# Altium PCB AgulhasCPU25.PCBDOC (part 8 of 10)
Units mm, origin at the board's own origin, x right, y up, seen from the top; angles counter-clockwise.
Board outline 179.96 x 114.94 mm, 2 copper layers (Top Layer, Top, Bottom Layer, Bottom), stack 1.341 mm thick; 247 components, 222 nets, 910 pads, 491 vias.
Unrouted connection lines stored in the file: 2.
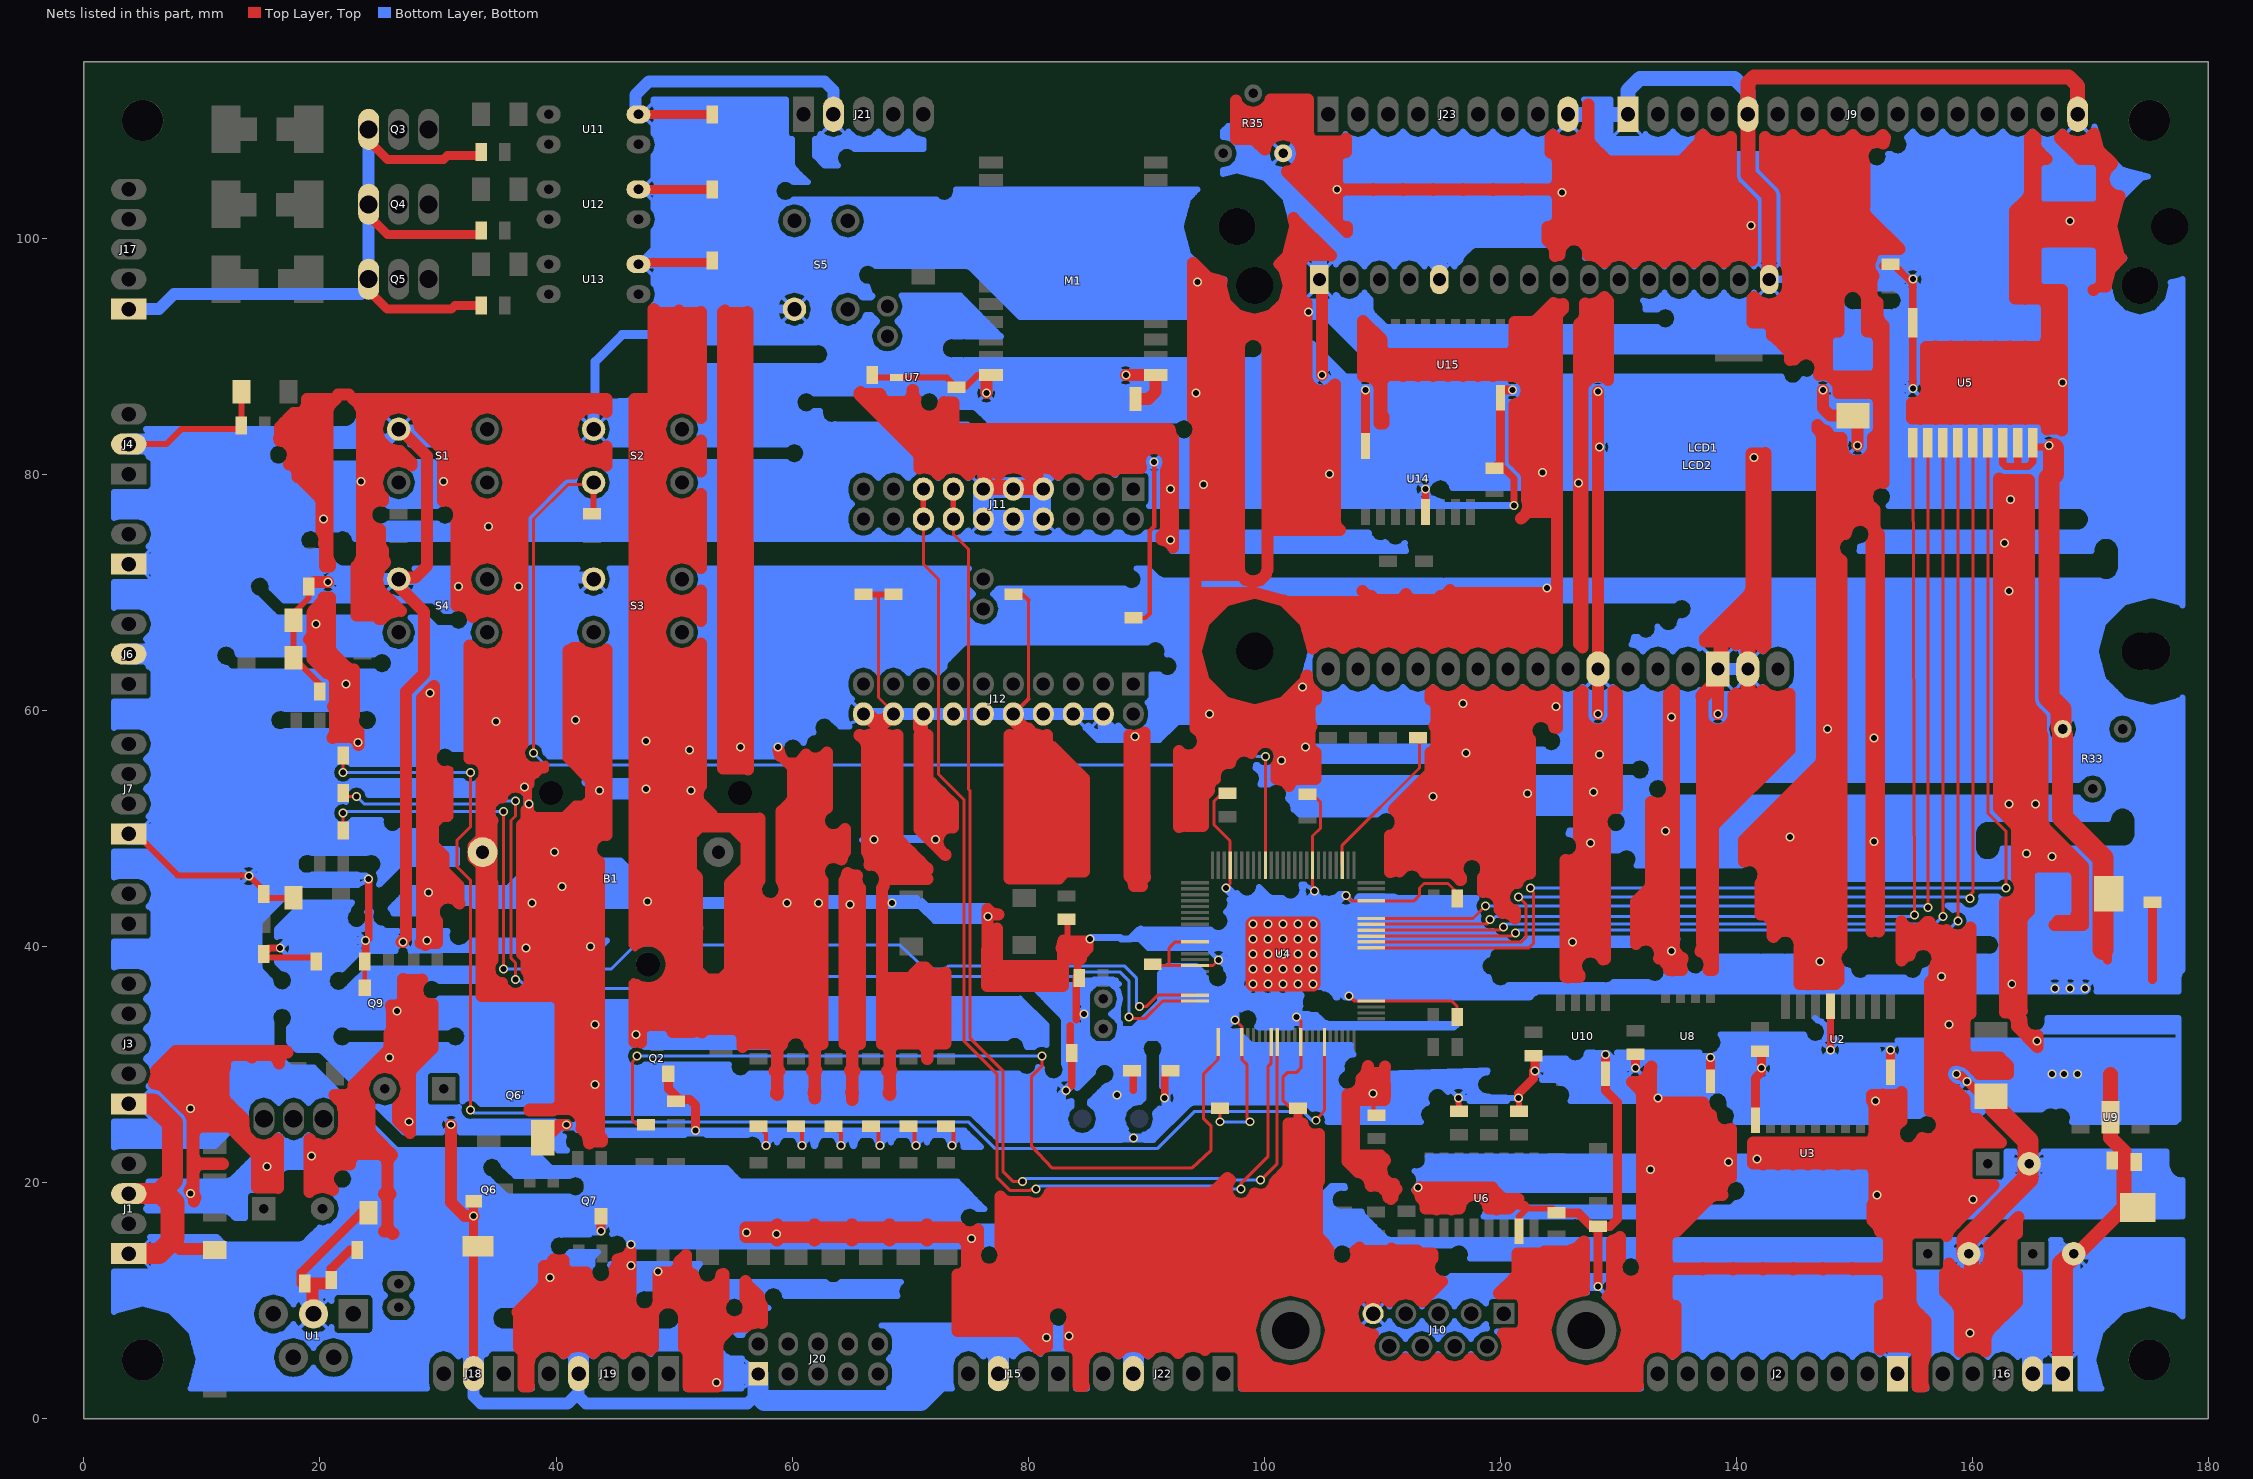
[diagram p8: the nets of this part, all layers, seen from the top]

## Via types
v1: diameter 0.762, hole 0.508, Top Layer, Top to Bottom Layer, Bottom, 489 vias
v2: diameter 0.864, hole 0.813, Top Layer, Top to Bottom Layer, Bottom, 2 vias

## Nets (pads, with @x,y where several pads share a name; then routed paths per layer and width w, separated by ;. In a path a pad name is that pad's centre, name@x,y a point inside that pad or via, vN(x,y) a via of type N, cw(c..) or ccw(c..) an arc to the next point about the centre after c; other vN are vias at no path point) (continued)
GND: (continued)
  Bottom Layer, Bottom w0.508: 89.789,71.12 89.637,71.628 89.281,71.984 89.179,72.034 90.145,72.034 90.627,71.552 90.983,71.196 91.44,71.018 115.037,71.018 115.189,70.968 115.316,71.018 170.764,71.018 171.069,70.891 171.552,70.891 172.009,71.069 172.364,71.425 172.568,71.882 172.568,72.492 172.568,73.762 172.364,74.219 172.009,74.574 171.552,74.778 171.069,74.778 170.612,74.574 170.256,74.219 170.078,73.762 170.078,73.508 150.419,73.508 150.495,73.787 ; 90.83,25.4 90.653,24.663 90.119,24.13 89.814,24.054 89.916,23.749 89.865,23.597 90.602,23.597 93.472,26.441 93.675,26.645 93.955,26.772 103.378,26.772 103.657,26.645 104.089,26.213 104.394,26.289 104.902,26.137 105.258,25.781 105.41,25.273 105.359,25.121 113.284,25.121 113.157,25.248 113.005,25.781 ; 90.83,25.4 90.729,25.857 90.983,26.111 91.135,26.264 91.567,26.137 92.075,26.289 92.431,26.645 92.583,27.178 92.431,27.686 92.075,28.042 91.567,28.194 91.338,28.118 91.338,30.734 ; 91.694,81.026 91.542,80.493 91.186,80.137 90.678,79.985 90.322,80.086 90.373,80.035 90.449,79.807 90.449,77.648 90.373,77.419 90.246,77.318 119.355,77.318 119.507,77.343 119.634,77.318 120.117,77.318 120.117,77.343 120.117,77.368 115.418,77.368 115.138,77.47 114.935,77.673 114.91,77.699 114.402,77.851 114.3,77.953 114.173,77.851 113.665,77.699 113.132,77.851 112.776,78.207 112.624,78.74 ; 91.821,65.024 91.745,64.745 91.821,64.77 92.329,64.618 92.685,64.262 92.837,63.754 92.685,63.221 92.329,62.865 91.821,62.713 91.288,62.865 91.135,63.017 90.449,63.017 90.449,61.138 90.373,60.909 90.145,60.681 90.119,60.681 90.221,60.554 90.399,59.969 90.399,59.385 90.221,58.801 89.662,58.242 88.9,58.014 88.113,58.242 87.63,58.725 87.122,58.242 86.36,58.014 85.573,58.242 85.09,58.725 84.861,58.522 85.903,57.506 91.11,57.506 92.329,58.699 92.532,58.903 92.812,59.03 122.758,59.03 122.911,59.157 123.444,59.309 123.952,59.157 124.308,58.801 124.435,58.395 124.841,58.268 125.197,57.912 125.349,57.404 ; 92.685,82.931 93.218,82.779 93.726,82.931 ; 96.495,33.782 96.647,34.29 97.003,34.646 97.536,34.798 98.019,34.671 98.069,34.696 98.603,34.849 99.111,34.696 99.466,34.341 99.619,33.833 99.466,33.299 99.39,33.198 99.492,33.122 102.311,33.122 102.21,33.147 101.854,33.503 101.702,34.036 101.854,34.544 102.21,34.9 102.743,35.052 103.048,34.95 103.022,35.077 103.022,35.509 103.149,35.865 102.87,35.789 102.337,35.941 102.235,36.043 102.108,35.941 101.6,35.789 101.067,35.941 100.965,36.043 100.838,35.941 100.33,35.789 99.797,35.941 99.695,36.043 99.568,35.941 99.06,35.789 98.527,35.941 98.171,36.297 98.019,36.83 ; 96.495,33.782 96.647,33.249 97.003,32.893 97.536,32.741 97.866,32.842 97.866,32.817 97.968,32.537 98.171,32.334 98.552,31.953 98.755,31.75 99.035,31.648 107.34,31.648 107.29,31.496 ; 96.774,42.926 97.003,42.672 97.155,42.164 ; 96.774,42.926 97.003,43.155 97.155,43.688 ; 97.155,43.688 97.053,43.993 97.282,44.069 ; 97.257,10.16 97.257,5.918 97.485,5.918 97.714,5.842 97.942,5.613 98.019,5.385 98.019,2.54 ; 97.282,44.069 97.638,44.425 97.688,44.526 98.019,44.196 98.552,44.044 99.06,44.196 99.416,44.552 99.568,45.034 100.203,44.399 100.406,44.196 100.686,44.094 101.549,44.094 101.702,43.942 102.235,43.79 102.743,43.942 103.099,44.298 103.251,44.831 ; 98.019,2.54 131.928,2.54 ; 98.019,2.54 131.928,2.54 ; 98.019,36.83 98.171,37.338 98.273,37.465 98.171,37.567 98.019,38.1 98.171,38.608 98.273,38.735 ; 98.019,40.64 98.171,41.148 98.273,41.275 98.171,41.377 98.019,41.91 98.171,42.418 98.527,42.774 99.06,42.926 99.568,42.774 99.695,42.672 99.797,42.774 100.33,42.926 100.838,42.774 100.965,42.672 101.067,42.774 101.6,42.926 102.108,42.774 102.235,42.672 102.337,42.774 102.87,42.926 103.378,42.774 103.505,42.672 103.607,42.774 104.14,42.926 104.648,42.774 105.004,42.418 105.156,41.91 105.004,41.377 104.902,41.275 105.004,41.148 105.156,40.64 ; 98.019,40.64 98.171,40.107 98.273,40.005 98.171,39.878 98.019,39.37 98.171,38.837 98.273,38.735 ; 99.568,89.789 99.619,89.814 99.898,90.094 99.924,90.145 100,90.348 100.051,90.475 100.051,90.526 100.076,90.678 100.051,90.805 100.051,90.856 100,90.983 99.974,91.084 104.064,91.084 106.553,88.595 106.756,88.392 107.036,88.29 143.815,88.29 143.891,87.986 144.247,87.63 144.78,87.478 145.288,87.63 145.644,87.986 145.669,88.062 145.923,87.986 146.431,88.138 146.787,88.494 146.939,89.027 ; 102.489,51.689 102.464,51.587 102.616,51.537 102.972,51.181 102.997,51.156 109.55,51.156 109.83,51.41 110.363,51.562 110.871,51.41 111.023,51.283 129.108,51.283 129.261,51.41 129.794,51.562 130.302,51.41 130.658,51.054 130.81,50.546 ; 102.489,51.689 102.337,52.197 102.006,52.553 102.108,52.959 101.956,53.467 101.6,53.823 101.092,53.975 100.559,53.823 100.406,53.696 99.67,53.696 99.822,54.229 99.67,54.737 99.314,55.093 99.238,55.118 99.314,55.372 99.416,55.372 99.568,55.22 100.101,55.067 100.609,55.22 100.965,55.575 101.117,56.109 101.092,56.159 101.905,56.159 103.505,54.559 103.708,54.356 103.988,54.254 131.14,54.254 131.293,54.102 131.826,53.95 132.334,54.102 132.69,54.458 132.842,54.991 132.69,55.499 132.334,55.855 131.826,56.007 131.293,55.855 131.14,55.728 104.445,55.728 103.251,56.921 122.225,56.921 122.377,56.769 122.657,56.667 123.647,56.667 123.8,56.515 124.333,56.363 124.841,56.515 125.197,56.871 125.349,57.404 ; 103.149,33.122 116.053,33.122 ; 103.149,33.122 116.053,33.122 ; 103.149,33.122 103.251,33.147 103.607,33.503 ; 103.251,44.831 103.149,45.237 103.403,45.237 103.378,45.187 103.226,44.679 103.378,44.145 103.734,43.79 104.267,43.637 104.775,43.79 105.105,44.12 105.486,44.018 105.943,44.145 106.045,43.79 106.401,43.434 106.934,43.282 107.442,43.434 107.798,43.79 107.925,44.196 107.975,44.221 110.973,44.221 111.125,44.171 111.354,44.094 117.983,44.094 117.856,43.942 117.704,43.434 117.856,42.901 118.161,42.596 118.085,42.291 118.237,41.758 118.593,41.402 ; 103.607,33.503 103.759,34.036 103.683,34.265 ; 103.683,34.265 103.911,34.188 104.419,34.188 104.699,33.909 105.029,33.579 105.308,33.452 105.435,33.426 116.408,33.426 116.053,33.122 ; 104.369,87.503 104.013,87.859 103.861,88.392 104.013,88.9 104.369,89.256 104.902,89.408 105.41,89.256 105.766,88.9 105.918,88.392 105.766,87.859 105.41,87.503 ; 104.369,87.503 104.902,87.351 105.41,87.503 ; 104.673,66.929 104.673,66.954 104.673,66.98 104.724,67.081 104.775,67.208 104.8,67.234 104.8,67.259 104.902,67.335 104.978,67.412 105.004,67.412 106.934,69.113 107.01,69.19 107.036,69.19 107.061,69.215 107.163,69.266 107.29,69.317 107.315,69.317 107.34,69.317 107.442,69.317 134.696,69.317 134.849,69.444 135.382,69.596 135.89,69.444 136.246,69.088 136.398,68.58 136.246,68.047 135.89,67.691 ; 104.673,66.929 104.673,66.802 104.648,66.7 104.673,66.675 104.673,65.456 104.572,65.43 103.962,64.821 103.81,64.211 103.81,62.763 103.962,62.154 104.572,61.544 105.41,61.316 106.223,61.544 106.68,61.976 ; 104.902,38.735 105.004,38.608 105.156,38.1 105.004,37.567 104.902,37.465 105.004,37.338 105.156,36.83 ; 104.902,38.735 105.004,38.837 105.156,39.37 105.004,39.878 104.902,40.005 105.004,40.107 105.156,40.64 ; 105.156,36.83 105.054,36.424 105.232,36.424 105.639,36.246 105.969,35.916 106.045,35.712 106.121,35.662 106.197,35.662 106.147,35.814 106.299,36.322 106.655,36.678 107.188,36.83 107.696,36.678 108.052,36.322 108.204,35.814 108.153,35.662 122.453,35.662 122.479,35.662 122.809,35.992 123.088,36.119 123.215,36.17 166.04,36.17 165.964,36.449 ; 105.512,18.542 105.562,18.669 105.562,18.72 105.588,18.847 105.664,19.05 105.689,19.101 105.969,19.38 106.02,19.406 106.223,19.482 106.35,19.533 106.401,19.533 106.553,19.558 106.68,19.533 106.832,19.533 106.782,19.685 ; 105.512,18.542 105.562,18.39 105.562,18.339 105.588,18.212 105.664,18.009 105.689,17.958 105.969,17.678 106.02,17.653 106.223,17.577 106.35,17.551 106.401,17.551 106.553,17.501 106.68,17.551 108.229,17.551 108.28,17.424 108.356,17.196 108.636,16.916 110.007,15.545 110.287,15.265 110.668,15.138 126.213,15.138 126.365,15.088 126.492,15.138 154.635,15.138 154.61,15.037 154.61,12.878 154.661,12.649 154.889,12.421 155.118,12.37 157.277,12.37 157.505,12.421 157.734,12.649 157.81,12.878 157.81,15.037 157.759,15.138 158.572,15.138 158.242,14.783 158.013,13.97 ; 106.68,61.976 107.112,61.544 107.95,61.316 108.763,61.544 109.22,61.976 ; 107.29,31.496 107.442,30.963 107.544,30.861 107.036,30.709 106.68,30.353 106.528,29.845 106.604,29.591 106.528,29.566 106.172,29.21 106.02,28.702 106.172,28.169 106.528,27.813 107.061,27.661 107.569,27.813 107.721,27.965 108.585,27.965 108.864,28.067 110.033,29.235 118.237,29.489 118.923,29.489 118.872,29.337 118.339,29.185 117.983,28.829 117.831,28.321 117.983,27.788 118.339,27.432 118.872,27.28 118.948,27.305 118.999,27.28 119.05,27.254 119.126,27.229 119.228,27.203 119.278,27.203 119.329,27.178 119.431,27.203 120.498,27.203 120.498,27.178 120.574,26.899 117.399,26.899 117.475,27.178 117.323,27.686 116.967,28.042 116.459,28.194 115.926,28.042 115.57,27.686 115.545,27.686 115.189,28.042 114.681,28.194 114.148,28.042 113.792,27.686 113.64,27.178 113.767,26.721 113.513,26.645 113.157,26.289 113.005,25.781 ; 107.544,87.122 107.696,87.63 108.052,87.986 108.585,88.138 109.093,87.986 109.449,87.63 109.601,87.122 ; 107.544,87.122 107.696,86.589 108.052,86.233 108.585,86.081 109.093,86.233 109.449,86.589 109.601,87.122 ; 109.22,61.976 109.652,61.544 110.49,61.316 111.303,61.544 111.76,61.976 ; 109.601,87.122 119.99,87.122 ; 111.76,61.976 112.192,61.544 113.03,61.316 113.843,61.544 114.3,61.976 ; 112.624,78.74 112.776,79.248 113.132,79.604 113.665,79.756 114.173,79.604 114.3,79.502 114.402,79.604 114.935,79.756 115.443,79.604 115.799,79.248 115.926,78.842 151.587,78.842 151.74,78.969 152.273,79.121 152.781,78.969 153.137,78.613 153.289,78.105 153.137,77.572 152.883,77.318 169.113,77.318 169.52,77.14 169.85,76.81 170.028,76.403 170.028,75.971 169.85,75.565 169.52,75.235 169.113,75.082 151.46,75.082 151.511,74.93 ; 114.148,12.827 114.249,13.183 107.264,13.183 107.112,13.03 106.604,12.878 106.07,13.03 105.715,13.386 105.562,13.919 105.715,14.427 106.07,14.783 106.604,14.935 107.112,14.783 107.264,14.656 115.824,14.656 115.976,14.783 116.51,14.935 117.018,14.783 117.373,14.427 117.526,13.919 117.424,13.564 130.378,13.564 130.531,13.691 131.064,13.843 131.572,13.691 131.928,13.335 132.08,12.827 ; 114.148,12.827 114.3,12.294 114.656,11.938 115.189,11.786 115.697,11.938 115.849,12.09 127.838,12.09 127.737,12.04 127.381,11.684 127.229,11.176 127.356,10.693 127.279,10.719 125.628,10.287 124.435,9.093 124.003,7.468 124.435,5.817 125.628,4.623 127.279,4.191 128.905,4.623 130.099,5.817 130.531,7.468 130.099,9.093 128.905,10.287 128.803,10.312 129.134,10.643 129.286,11.176 129.134,11.684 128.778,12.04 128.676,12.09 130.378,12.09 130.531,11.938 131.064,11.786 131.572,11.938 131.928,12.294 132.08,12.827 ; 114.3,61.976 114.732,61.544 115.57,61.316 116.383,61.544 116.84,61.976 ; 116.611,98.171 116.713,98.45 116.916,98.654 117.348,99.085 117.551,99.289 117.831,99.416 125.552,99.416 125.705,99.543 126.238,99.695 126.746,99.543 127.102,99.187 127.254,98.679 127.152,98.298 127.533,98.374 128.245,98.196 128.778,97.663 128.803,97.587 128.803,97.663 129.337,98.196 130.073,98.374 130.785,98.196 131.318,97.663 131.343,97.587 131.343,97.663 131.877,98.196 132.613,98.374 133.325,98.196 133.858,97.663 133.883,97.587 133.883,97.663 134.417,98.196 135.153,98.374 135.865,98.196 136.398,97.663 136.423,97.587 136.423,97.663 136.957,98.196 137.693,98.374 138.405,98.196 138.938,97.663 138.963,97.587 138.963,97.663 139.497,98.196 140.233,98.374 140.945,98.196 141.478,97.663 141.503,97.587 141.503,97.663 142.037,98.196 142.773,98.374 143.485,98.196 144.018,97.663 144.17,97.13 144.17,95.834 144.018,95.301 143.485,94.767 142.773,94.59 142.037,94.767 141.503,95.301 141.503,95.377 141.478,95.301 140.945,94.767 140.233,94.59 139.497,94.767 138.963,95.301 138.963,95.377 138.938,95.301 138.405,94.767 137.693,94.59 136.957,94.767 136.423,95.301 136.423,95.377 136.398,95.301 135.865,94.767 135.153,94.59 134.417,94.767 133.883,95.301 133.883,95.377 133.858,95.301 133.325,94.767 132.613,94.59 132.08,94.717 132.182,94.615 132.334,94.107 132.283,93.955 133.299,93.955 133.452,94.082 133.985,94.234 134.493,94.082 134.849,93.726 135.001,93.218 ; 116.611,98.171 116.611,98.146 116.103,97.663 116.103,97.587 116.078,97.663 115.545,98.196 114.833,98.374 114.097,98.196 113.563,97.663 113.563,97.587 113.538,97.663 113.005,98.196 112.293,98.374 111.557,98.196 111.023,97.663 111.023,97.587 110.998,97.663 110.465,98.196 109.753,98.374 109.017,98.196 108.483,97.663 108.483,97.587 108.458,97.663 107.925,98.196 107.213,98.374 106.477,98.196 106.07,97.765 106.07,97.815 105.994,98.044 105.766,98.273 105.537,98.349 103.784,98.349 103.556,98.273 103.327,98.044 103.276,97.815 103.276,95.148 103.327,94.92 103.556,94.691 103.784,94.64 105.537,94.64 105.766,94.691 105.994,94.92 106.07,95.148 106.07,95.199 106.477,94.767 107.213,94.59 107.925,94.767 108.458,95.301 108.483,95.377 108.483,95.301 109.017,94.793 109.017,94.209 109.017,93.929 109.118,93.65 109.322,93.447 109.982,92.786 110.185,92.583 110.465,92.481 133.299,92.481 133.452,92.329 133.985,92.177 134.493,92.329 134.849,92.685 135.001,93.218 ; 116.84,61.976 117.272,61.544 118.11,61.316 118.923,61.544 119.38,61.976 ; 118.212,38.354 118.364,37.821 118.72,37.465 118.999,37.389 119.126,36.932 119.482,36.576 120.015,36.424 120.523,36.576 120.675,36.728 128.753,36.728 128.905,36.678 129.413,36.83 ; 118.212,38.354 118.364,38.862 118.72,39.218 118.897,39.268 118.999,39.624 119.355,39.98 119.888,40.132 120.218,40.03 120.371,40.107 131.648,40.107 131.801,40.234 132.334,40.386 132.842,40.234 133.198,39.878 133.35,39.37 133.35,39.345 135.255,39.345 135.026,39.548 135.001,39.599 134.925,39.802 134.899,39.929 134.899,39.98 134.849,40.132 134.899,40.259 134.899,40.31 134.925,40.437 135.001,40.64 135.001,40.665 122.174,40.665 122.149,40.615 121.793,40.259 ; 118.567,17.12 126.213,17.12 ; 118.567,17.12 126.213,17.12 ; 118.567,17.12 118.643,17.196 118.796,17.729 118.745,17.882 139.395,17.882 ; 118.593,41.402 119.126,41.25 119.329,41.3 119.38,41.123 119.736,40.767 120.269,40.615 120.371,40.64 ; 119.38,61.976 119.812,61.544 120.65,61.316 121.463,61.544 121.92,61.976 ; 119.99,87.122 120.142,87.63 120.498,87.986 121.031,88.138 121.539,87.986 121.895,87.63 122.047,87.122 ; 119.99,87.122 120.142,86.589 120.498,86.233 121.031,86.081 121.539,86.233 121.895,86.589 122.047,87.122 ; 120.371,40.64 120.396,40.615 120.752,40.259 ; 120.752,40.259 121.285,40.107 121.793,40.259 ; 121.92,61.976 122.352,61.544 123.19,61.316 124.003,61.544 124.46,61.976 ; 124.46,61.976 124.892,61.544 125.73,61.316 126.543,61.544 127,61.976 ; 125.857,49.784 125.781,49.505 126.238,49.378 126.594,49.022 126.746,48.514 126.644,48.133 130.023,48.133 130.175,48.26 130.708,48.412 131.216,48.26 131.572,47.904 131.724,47.396 131.572,46.863 131.547,46.838 140.411,46.838 140.564,46.965 141.097,47.117 141.605,46.965 141.961,46.609 142.113,46.101 142.011,45.695 162.128,45.695 162.281,45.822 162.814,45.974 163.322,45.822 163.678,45.466 163.83,44.958 163.678,44.425 163.322,44.069 ; 125.857,49.784 125.857,49.809 129.108,49.809 129.261,49.657 129.794,49.505 130.302,49.657 130.658,50.013 130.81,50.546 ; 126.213,17.12 126.365,17.145 126.492,17.12 ; 126.492,17.12 177.521,17.12 ; 126.492,17.12 177.521,17.12 ; 127,61.976 127.432,61.544 128.27,61.316 129.083,61.544 129.54,61.976 ; 127.229,59.69 127.381,60.198 127.737,60.554 128.27,60.706 128.778,60.554 129.134,60.198 129.286,59.69 ; 127.229,59.69 127.381,59.157 127.737,58.801 128.27,58.649 128.778,58.801 129.134,59.157 129.286,59.69 ; 127.864,81.407 127.508,81.763 127.356,82.296 127.508,82.804 127.864,83.16 128.397,83.312 128.905,83.16 129.261,82.804 129.413,82.296 129.261,81.763 128.905,81.407 ; 127.864,81.407 128.397,81.255 128.905,81.407 ; 129.286,59.69 137.389,59.69 ; 129.413,36.83 129.565,36.982 132.537,36.982 132.563,36.957 133.096,36.805 133.604,36.957 133.96,37.313 134.112,37.846 134.112,37.871 135.712,37.871 135.992,37.592 ; 129.54,61.976 129.972,61.544 130.81,61.316 131.623,61.544 132.08,61.976 ; 131.318,66.167 131.166,65.634 131.115,65.557 131.623,65.43 132.08,64.999 132.512,65.43 133.35,65.659 134.163,65.43 134.62,64.999 135.052,65.43 135.89,65.659 136.703,65.43 136.881,65.253 136.881,65.303 137.109,65.532 137.338,65.608 139.497,65.608 139.725,65.532 139.954,65.303 139.954,65.253 140.132,65.43 140.97,65.659 141.783,65.43 142.24,64.999 142.672,65.43 143.51,65.659 144.323,65.43 144.932,64.821 145.11,64.211 145.11,62.763 144.932,62.154 144.323,61.544 143.51,61.316 142.672,61.544 142.24,61.976 ; 131.318,66.167 131.318,66.192 131.648,66.192 131.801,66.04 132.334,65.888 132.842,66.04 133.198,66.396 133.35,66.929 ; 131.928,2.54 131.826,2.972 131.826,4.572 131.978,5.156 132.537,5.715 133.325,5.944 134.087,5.715 134.595,5.232 135.077,5.715 135.865,5.944 136.627,5.715 137.135,5.232 137.617,5.715 138.405,5.944 139.167,5.715 139.675,5.232 140.157,5.715 140.945,5.944 141.707,5.715 142.215,5.232 142.697,5.715 143.485,5.944 144.247,5.715 144.755,5.232 145.237,5.715 146.025,5.944 146.787,5.715 147.295,5.232 147.777,5.715 148.565,5.944 149.327,5.715 149.835,5.232 150.317,5.715 151.105,5.944 151.867,5.715 152.146,5.436 152.197,5.588 ; 132.08,61.976 132.512,61.544 133.35,61.316 134.163,61.544 134.62,61.976 ; 132.817,52.451 132.461,52.807 132.309,53.34 132.461,53.848 132.817,54.204 133.35,54.356 133.858,54.204 134.01,54.077 168.961,54.077 169.469,54.559 170.18,54.737 170.866,54.559 171.399,54.026 171.577,53.34 171.399,52.629 170.866,52.095 170.18,51.918 169.469,52.095 168.961,52.603 134.01,52.603 133.858,52.451 ; 132.817,52.451 133.35,52.299 133.858,52.451 ; 133.35,66.929 133.299,67.081 133.325,67.081 133.35,67.031 133.706,66.675 134.239,66.523 134.747,66.675 135.103,67.031 135.255,67.564 135.382,67.539 135.89,67.691 ; 134.62,61.976 135.052,61.544 135.89,61.316 136.703,61.544 136.881,61.722 136.881,61.671 137.109,61.443 137.338,61.392 139.497,61.392 139.725,61.443 139.954,61.671 139.954,61.722 140.132,61.544 140.97,61.316 141.783,61.544 142.24,61.976 ; 135.992,37.592 136.525,37.44 137.033,37.592 ; 137.033,37.592 137.389,37.948 137.541,38.481 137.389,38.989 137.262,39.141 141.961,39.141 142.113,39.091 142.24,39.141 143.993,39.141 144.145,39.091 144.272,39.141 148.615,39.141 148.565,38.989 148.717,38.456 149.073,38.1 149.479,37.973 ; 137.389,59.69 137.541,60.198 137.897,60.554 138.43,60.706 138.938,60.554 139.294,60.198 139.446,59.69 ; 137.389,59.69 137.541,59.157 137.897,58.801 138.43,58.649 138.938,58.801 139.294,59.157 139.446,59.69 ; 139.395,17.882 139.675,17.983 139.954,18.263 ; 139.954,18.263 140.462,18.415 140.818,18.771 140.97,19.304 140.818,19.812 140.462,20.168 139.954,20.32 139.421,20.168 139.065,19.812 138.938,19.355 112.725,19.355 112.7,19.355 113.005,19.66 113.157,20.193 113.005,20.701 112.725,20.98 112.903,20.93 113.411,21.082 113.767,21.438 113.919,21.971 113.843,22.2 159.436,22.2 159.69,22.301 159.69,20.498 159.741,20.269 159.969,20.041 160.198,19.99 162.357,19.99 162.585,20.041 162.814,20.269 162.89,20.498 162.89,22.631 163.551,22.631 163.347,22.403 163.119,21.59 163.347,20.752 163.957,20.142 164.795,19.914 165.608,20.142 166.218,20.752 166.446,21.59 166.218,22.403 166.014,22.631 176.428,22.631 176.428,22.327 176.428,21.844 176.428,21.336 176.606,20.879 176.657,20.828 176.708,20.701 177.038,20.371 177.114,20.345 177.14,20.32 177.267,20.269 177.444,20.218 177.521,20.218 177.673,20.168 177.8,20.193 177.8,17.12 177.673,17.145 177.521,17.12 ; 146.279,87.122 146.431,87.63 146.787,87.986 147.32,88.138 147.828,87.986 148.184,87.63 148.336,87.122 ; 146.279,87.122 146.431,86.589 146.787,86.233 147.32,86.081 147.828,86.233 148.184,86.589 148.336,87.122 ; 146.939,89.027 146.787,89.535 146.431,89.891 145.923,90.043 145.694,90.272 145.415,90.399 108.128,90.399 105.308,93.193 105.029,93.32 99.238,93.32 100.508,93.65 101.498,94.64 101.854,95.987 101.498,97.307 101.016,97.815 101.803,98.603 102.438,100.99 101.803,103.353 100.051,105.105 97.688,105.74 96.52,105.435 96.52,105.766 97.206,105.943 97.739,106.477 97.917,107.188 97.739,107.874 97.206,108.407 96.52,108.585 96.52,109.068 96.926,109.499 103.911,109.499 103.911,108.89 103.962,108.661 104.191,108.433 104.419,108.382 106.375,108.382 106.604,108.433 106.832,108.661 106.883,108.814 107.163,108.534 107.95,108.306 108.712,108.534 109.22,109.017 109.703,108.534 110.49,108.306 111.252,108.534 111.76,109.017 112.243,108.534 113.03,108.306 113.792,108.534 114.3,109.017 114.783,108.534 115.57,108.306 116.332,108.534 116.84,109.017 117.323,108.534 118.11,108.306 118.872,108.534 119.38,109.017 119.863,108.534 120.65,108.306 121.412,108.534 121.92,109.017 122.403,108.534 123.19,108.306 123.952,108.534 124.46,109.017 124.943,108.534 125.73,108.306 126.492,108.534 127.051,109.093 127.229,109.677 127.229,111.277 127.102,111.76 129.311,111.76 129.311,108.89 129.362,108.661 129.591,108.433 129.819,108.382 131.775,108.382 132.004,108.433 132.232,108.661 132.283,108.814 132.563,108.534 133.35,108.306 134.112,108.534 134.62,109.017 135.103,108.534 135.89,108.306 136.652,108.534 137.16,109.017 137.643,108.534 137.719,108.356 137.947,108.128 138.608,107.467 138.836,107.239 139.141,107.112 142.265,107.112 142.926,106.451 143.154,106.223 143.459,106.096 151.308,106.096 151.359,106.045 151.892,105.893 152.4,106.045 152.756,106.401 152.908,106.934 ; 148.819,94.742 148.869,94.869 148.869,94.92 148.895,95.047 148.971,95.25 148.996,95.301 149.276,95.58 149.327,95.606 149.53,95.682 149.657,95.733 149.708,95.733 149.86,95.758 149.987,95.733 153.01,95.733 153.162,95.758 153.289,95.733 153.34,95.733 153.467,95.682 153.67,95.606 153.721,95.58 154,95.301 154.026,95.25 154.102,95.047 154.153,94.92 154.153,94.869 154.178,94.742 ; 148.819,94.742 148.869,94.59 148.869,94.539 148.895,94.412 148.971,94.209 148.996,94.158 149.276,93.878 149.327,93.853 149.53,93.777 149.657,93.751 149.708,93.751 149.86,93.701 149.987,93.751 153.01,93.751 153.162,93.701 153.289,93.751 153.34,93.751 153.467,93.777 153.67,93.853 153.721,93.878 154,94.158 154.026,94.209 154.102,94.412 154.153,94.539 154.153,94.59 154.178,94.742 ; 149.479,37.973 149.606,37.567 149.962,37.211 ; 149.962,37.211 150.495,37.059 151.003,37.211 ; 150.495,73.787 150.47,73.889 150.495,73.889 151.003,74.041 151.359,74.397 151.511,74.93 ; 151.003,37.211 154.407,37.211 ; 151.003,37.211 151.155,37.363 154.254,37.363 154.407,37.211 ; 152.197,5.588 152.425,5.817 152.654,5.893 154.61,5.893 154.838,5.817 155.067,5.588 ; 152.908,106.934 152.857,107.112 153.086,107.112 153.137,107.061 153.67,106.909 154.178,107.061 154.534,107.417 154.686,107.95 154.534,108.458 154.457,108.534 154.94,109.017 155.423,108.534 156.21,108.306 156.972,108.534 157.48,109.017 157.963,108.534 158.75,108.306 159.512,108.534 160.02,109.017 160.503,108.534 161.29,108.306 162.052,108.534 162.56,109.017 163.043,108.534 163.83,108.306 164.592,108.534 165.1,109.017 165.583,108.534 166.37,108.306 167.132,108.534 167.64,109.017 168.123,108.534 168.91,108.306 169.672,108.534 170.231,109.093 170.332,109.474 170.84,107.594 172.593,105.842 174.854,105.232 174.32,105.105 172.568,103.353 171.933,100.99 172.568,98.603 172.872,98.298 172.847,98.298 171.856,97.307 171.501,95.987 171.856,94.64 172.847,93.65 174.193,93.294 175.514,93.65 176.505,94.64 176.86,95.987 176.784,96.241 177.8,96.52 177.8,68.885 177.571,69.113 175.209,69.748 172.822,69.113 171.069,67.361 170.434,64.999 171.069,62.611 172.822,60.858 175.209,60.223 177.571,60.858 177.8,61.087 177.8,38.024 177.597,37.821 177.444,37.414 177.444,36.271 177.444,36.17 170.485,36.17 170.561,36.449 ; 154.407,37.211 154.94,37.059 155.448,37.211 ; 154.407,86.36 154.051,86.716 153.899,87.249 154.051,87.757 154.407,88.113 154.94,88.265 155.448,88.113 155.804,87.757 155.956,87.249 155.804,86.716 155.448,86.36 ; 154.407,86.36 154.94,86.208 155.448,86.36 ; 155.067,5.588 155.143,5.359 155.143,2.54 ; 155.143,2.54 156.083,2.54 ; 155.143,2.54 156.083,2.54 ; 155.448,37.211 155.804,37.567 155.931,37.973 ; 155.931,37.973 156.337,38.1 156.693,38.456 156.845,38.989 156.794,39.141 161.265,39.141 161.417,39.091 161.544,39.141 161.595,39.141 161.722,39.167 161.925,39.243 161.976,39.268 162.255,39.548 162.281,39.599 162.357,39.802 162.408,39.929 162.408,39.98 162.433,40.132 162.408,40.259 ; 156.083,2.54 155.981,2.972 155.981,4.572 156.134,5.156 156.693,5.715 157.48,5.944 158.242,5.715 158.75,5.232 159.233,5.715 160.02,5.944 160.782,5.715 161.29,5.232 161.773,5.715 162.56,5.944 163.322,5.715 163.83,5.232 164.313,5.715 165.1,5.944 165.862,5.715 166.141,5.436 166.192,5.588 ; 156.743,24.028 158.877,24.028 ; 156.743,24.028 158.877,24.028 ; 158.013,13.97 158.242,13.132 158.852,12.522 159.69,12.294 160.503,12.522 161.112,13.132 161.341,13.97 ; 158.877,24.028 160.63,25.781 160.884,26.035 161.214,26.187 165.862,26.187 165.964,26.289 165.989,26.314 ; 159.766,42.164 159.614,41.631 159.258,41.275 158.75,41.123 161.265,41.123 161.417,41.148 161.544,41.123 161.595,41.123 161.722,41.072 161.925,40.996 161.976,40.97 162.255,40.691 162.281,40.64 162.357,40.437 162.408,40.31 162.408,40.259 ; 159.766,42.164 159.614,42.672 159.258,43.028 158.75,43.18 158.344,43.078 157.988,43.409 157.886,43.459 158.953,43.459 159.233,43.18 159.766,43.028 160.274,43.18 160.63,43.536 160.782,44.069 ; 160.782,44.069 162.281,44.069 ; 160.782,44.069 160.731,44.221 162.128,44.221 162.281,44.069 ; 161.341,13.97 161.112,14.783 160.782,15.138 163.525,15.138 163.5,15.037 163.5,12.878 163.551,12.649 163.779,12.421 164.008,12.37 166.167,12.37 166.395,12.421 166.624,12.649 166.7,12.878 166.7,15.037 166.649,15.138 167.462,15.138 167.132,14.783 166.903,13.97 ; 162.281,44.069 162.814,43.917 163.322,44.069 ; 165.964,36.449 166.116,36.957 166.472,37.313 167.005,37.465 167.513,37.313 167.64,37.211 167.742,37.313 168.275,37.465 168.783,37.313 168.91,37.211 169.012,37.313 169.545,37.465 170.053,37.313 170.409,36.957 170.561,36.449 ; 166.192,5.588 166.421,5.817 166.649,5.893 168.605,5.893 168.834,5.817 169.062,5.588 ; 166.903,13.97 167.132,13.132 167.742,12.522 168.58,12.294 169.393,12.522 170.002,13.132 170.231,13.97 ; 169.062,5.588 169.139,5.359 169.139,2.54 ; 169.139,2.54 170.917,2.54 ; 169.139,2.54 170.917,2.54 ; 170.231,13.97 170.002,14.783 169.672,15.138 177.521,15.138 177.673,15.088 177.8,15.113 ; 170.917,2.54 170.84,2.591 170.205,4.978 170.84,7.341 172.593,9.093 174.981,9.728 177.343,9.093 177.8,8.636 177.8,15.113 ; 14.122,8.865 14.376,9.804 15.088,10.516 16.053,10.77 16.993,10.516 17.704,9.804 17.755,9.677 17.78,9.804 18.491,10.516 19.456,10.77 20.396,10.516 20.98,9.957 20.98,10.185 21.031,10.414 21.26,10.643 21.488,10.719 24.155,10.719 24.384,10.643 24.613,10.414 24.689,10.185 24.689,7.518 24.613,7.29 24.384,7.061 24.155,7.01 21.488,7.01 21.26,7.061 21.031,7.29 20.98,7.518 20.98,7.747 20.396,7.188 19.456,6.934 18.491,7.188 17.78,7.899 17.755,8.026 17.704,7.899 16.993,7.188 16.053,6.934 15.088,7.188 14.376,7.899 14.122,8.865 ; 15.596,59.182 15.748,59.69 16.104,60.046 16.637,60.198 17.043,60.096 23.571,60.096 24.003,60.198 24.511,60.046 24.867,59.69 25.019,59.182 24.867,58.649 24.511,58.293 24.003,58.141 23.571,58.268 17.043,58.268 16.637,58.141 16.104,58.293 15.748,58.649 15.596,59.182 ; 15.824,5.182 16.078,6.121 16.789,6.833 17.755,7.087 18.694,6.833 19.406,6.121 19.456,5.994 19.482,6.121 20.193,6.833 21.158,7.087 22.098,6.833 22.809,6.121 23.063,5.182 22.809,4.216 22.098,3.505 21.158,3.251 20.193,3.505 19.482,4.216 19.456,4.343 19.406,4.216 18.694,3.505 17.755,3.251 16.789,3.505 16.078,4.216 15.824,5.182 ; 24.994,79.299 25.222,80.112 25.832,80.721 26.67,80.95 27.483,80.721 28.092,80.112 28.321,79.299 28.092,78.461 27.483,77.851 26.67,77.622 25.832,77.851 25.222,78.461 24.994,79.299 ; 25.019,9.423 25.197,10.109 25.502,10.414 25.197,10.719 25.019,11.43 25.197,12.116 25.705,12.624 26.238,12.776 27.076,12.776 27.61,12.624 28.118,12.116 28.296,11.43 28.118,10.719 27.813,10.414 28.118,10.109 28.296,9.423 28.118,8.712 27.61,8.204 27.076,8.077 26.238,8.077 25.705,8.204 25.197,8.712 25.019,9.423 ; 32.487,66.599 32.715,67.412 33.325,68.021 34.163,68.25 34.976,68.021 35.585,67.412 35.814,66.599 35.585,65.761 34.976,65.151 34.163,64.922 33.325,65.151 32.715,65.761 32.487,66.599 ; 32.487,79.299 32.715,80.112 33.325,80.721 34.163,80.95 34.976,80.721 35.585,80.112 35.814,79.299 35.585,78.461 34.976,77.851 34.163,77.622 33.325,77.851 32.715,78.461 32.487,79.299 ; 41.504,79.299 41.732,80.112 42.342,80.721 43.18,80.95 43.993,80.721 44.602,80.112 44.831,79.299 44.602,78.461 43.993,77.851 43.18,77.622 42.342,77.851 41.732,78.461 41.504,79.299 ; 48.997,79.299 49.225,80.112 49.835,80.721 50.673,80.95 51.486,80.721 52.095,80.112 52.324,79.299 52.095,78.461 51.486,77.851 50.673,77.622 49.835,77.851 49.225,78.461 48.997,79.299 ; 94.412,64.999 95.047,67.361 96.799,69.113 99.187,69.748 101.549,69.113 103.302,67.361 103.937,64.999 103.302,62.611 101.549,60.858 99.187,60.223 96.799,60.858 95.047,62.611 94.412,64.999 ; 98.958,7.468 99.39,9.093 100.584,10.287 102.235,10.719 103.861,10.287 105.054,9.093 105.486,7.468 105.054,5.817 103.861,4.623 102.235,4.191 100.584,4.623 99.39,5.817 98.958,7.468 ; 100.178,107.188 100.355,106.477 100.889,105.943 101.6,105.766 102.286,105.943 102.819,106.477 102.997,107.188 102.819,107.874 102.286,108.407 101.6,108.585 100.889,108.407 100.355,107.874 100.178,107.188 ; 107.645,8.89 107.874,9.652 108.433,10.211 109.22,10.439 109.982,10.211 110.541,9.652 110.592,9.5 110.642,9.652 111.201,10.211 111.989,10.439 112.751,10.211 113.309,9.652 113.36,9.5 113.411,9.652 113.97,10.211 114.757,10.439 115.519,10.211 116.078,9.652 116.129,9.5 116.18,9.652 116.738,10.211 117.526,10.439 118.288,10.211 118.796,9.728 118.796,9.855 118.847,10.084 119.075,10.312 119.304,10.389 121.26,10.389 121.488,10.312 121.717,10.084 121.793,9.855 121.793,7.899 121.717,7.671 121.488,7.442 121.26,7.391 119.736,7.391 120.218,6.883 120.447,6.121 120.218,5.334 119.659,4.775 118.897,4.547 118.11,4.775 117.551,5.334 117.5,5.486 117.45,5.334 116.891,4.775 116.129,4.547 115.341,4.775 114.783,5.334 114.732,5.486 114.681,5.334 114.122,4.775 113.36,4.547 112.573,4.775 112.014,5.334 111.963,5.486 111.912,5.334 111.354,4.775 110.592,4.547 109.804,4.775 109.245,5.334 109.017,6.121 109.245,6.883 109.804,7.442 110.592,7.671 111.354,7.442 111.912,6.883 111.963,6.731 112.014,6.883 112.573,7.442 113.36,7.671 114.122,7.442 114.681,6.883 114.732,6.731 114.783,6.883 115.341,7.442 116.129,7.671 116.891,7.442 117.45,6.883 117.5,6.731 117.551,6.883 118.11,7.442 118.872,7.645 118.847,7.671 118.796,7.899 118.796,8.026 118.288,7.544 117.526,7.315 116.738,7.544 116.18,8.103 116.129,8.255 116.078,8.103 115.519,7.544 114.757,7.315 113.97,7.544 113.411,8.103 113.36,8.255 113.309,8.103 112.751,7.544 111.989,7.315 111.201,7.544 110.642,8.103 110.592,8.255 110.541,8.103 109.982,7.544 109.22,7.315 108.433,7.544 107.874,8.103 107.645,8.89 ; 127.229,86.995 127.381,87.503 127.737,87.859 128.27,88.011 128.778,87.859 129.134,87.503 129.286,86.995 129.134,86.462 128.778,86.106 128.27,85.954 127.737,86.106 127.381,86.462 127.229,86.995 ; 130.404,29.718 130.556,30.226 130.912,30.582 131.445,30.734 131.953,30.582 132.309,30.226 132.461,29.718 132.309,29.185 131.953,28.829 131.445,28.677 130.912,28.829 130.556,29.185 130.404,29.718 ; 141.072,29.718 141.224,30.226 141.58,30.582 142.113,30.734 142.621,30.582 142.977,30.226 143.129,29.718 142.977,29.185 142.621,28.829 142.113,28.677 141.58,28.829 141.224,29.185 141.072,29.718 ; 149.2,82.423 149.352,82.931 149.708,83.287 150.241,83.439 150.749,83.287 151.105,82.931 151.257,82.423 151.105,81.89 150.749,81.534 150.241,81.382 149.708,81.534 149.352,81.89 149.2,82.423 ; 153.899,96.52 154.051,97.028 154.407,97.384 154.94,97.536 155.448,97.384 155.804,97.028 155.956,96.52 155.804,95.987 155.448,95.631 154.94,95.479 154.407,95.631 154.051,95.987 153.899,96.52 ; 157.582,29.21 157.734,29.718 158.09,30.074 158.623,30.226 159.131,30.074 159.487,29.718 159.537,29.591 160.02,29.439 160.376,29.083 160.528,28.575 160.376,28.042 160.02,27.686 159.512,27.534 158.979,27.686 158.623,28.042 158.572,28.169 158.09,28.321 157.734,28.677 157.582,29.21 ; 160.045,48.133 160.045,49.276 160.045,49.759 160.223,50.216 160.579,50.571 161.036,50.775 171.475,50.775 171.475,50.902 171.653,51.359 172.009,51.714 172.466,51.918 172.949,51.918 173.406,51.714 173.761,51.359 173.965,50.902 173.965,49.759 173.965,49.276 173.761,48.819 173.406,48.463 172.949,48.285 162.535,48.285 162.535,48.133 162.331,47.676 161.976,47.32 161.519,47.142 161.036,47.142 160.579,47.32 160.223,47.676 160.045,48.133 ; 165.456,82.423 165.608,82.931 165.964,83.287 166.497,83.439 167.005,83.287 167.361,82.931 167.513,82.423 167.361,81.89 167.005,81.534 166.497,81.382 165.964,81.534 165.608,81.89 165.456,82.423 ; 165.71,29.21 165.862,29.718 166.218,30.074 166.751,30.226 167.259,30.099 167.767,30.226 168.275,30.074 168.326,30.023 168.377,30.074 168.91,30.226 169.418,30.074 169.774,29.718 169.926,29.21 169.774,28.677 169.418,28.321 168.91,28.169 168.377,28.321 168.326,28.372 168.275,28.321 167.767,28.169 167.259,28.296 166.751,28.169 166.218,28.321 165.862,28.677 165.71,29.21 ; 166.218,58.42 166.395,59.106 166.929,59.639 167.64,59.817 168.326,59.639 168.859,59.106 169.037,58.42 168.859,57.709 168.326,57.175 167.64,56.998 166.929,57.175 166.395,57.709 166.218,58.42 ; 171.298,58.42 171.475,59.106 172.009,59.639 172.72,59.817 173.406,59.639 173.939,59.106 174.117,58.42 173.939,57.709 173.406,57.175 172.72,56.998 172.009,57.175 171.475,57.709 171.298,58.42
  Bottom Layer, Bottom w0.61: v1(13.97,45.974) 23.876,45.974 v1(24.13,45.72) ; v1(16.637,39.878) 17.272,40.513 v1(23.876,40.513) ; v1@37.516,53.797 37.668,53.95 ; 37.541,52.629 37.541,51.892 v1@37.795,51.892 ; v1@37.643,52.324 37.643,53.797 ; v1@37.668,51.892 37.668,53.746 ; 42.418,48.006 43.18,47.244 45.466,47.244 48.895,43.815 48.133,43.815 45.085,46.863 43.942,46.863 44.323,46.863 47.244,43.942 46.863,43.942 44.196,46.609 44.196,45.847 46.228,43.815 46.228,44.704 42.799,48.133 ; 43.053,48.387 43.18,48.387 43.18,46.99 45.212,44.958 ; 43.942,53.848 43.942,53.975 52.324,53.975 52.451,53.848 52.197,53.848 ; v1(85.217,40.64) 85.344,40.767 87.757,40.767 87.884,40.64 88.646,40.64 89.408,41.402 89.916,41.402 ; v1(96.139,38.862) 98.425,38.862 98.933,39.37 v1(99.06,39.37) v1(100.33,39.37) ; v1(113.665,78.74) 113.665,77.978 114.3,77.343 v1(121.158,77.343) ; LCD2.16@142.773,96.495 142.748,96.52 v1(154.94,96.52) ; v1(147.32,87.122) 147.447,87.249 147.574,87.249 v1(154.94,87.249) ; 147.955,30.861 v1(147.955,31.242)
  Bottom Layer, Bottom w0.762: v1(23.876,40.513) v1@24.003,40.386 ; v1(33.02,17.145) 39.675,17.145 40.945,15.875 v1(43.815,15.875) ; 39.878,24.765 v1@40.894,24.765 ; v1(40.894,24.892) v1@40.894,24.765 ; 43.307,85.471 43.307,85.852 43.307,89.535 45.593,91.821 47.879,91.821 48.946,92.888 ; U12.2@46.99,104.14 46.99,104.013 49.022,104.013 ; U11.2@46.99,110.49 48.387,110.49 49.022,109.855 49.022,104.013 ; 48.768,93.091 48.946,92.888 ; v1(51.816,24.384) v1@51.816,24.257 ; 57.658,24.13 57.785,24.13 ; v1(57.785,23.114) 57.785,24.13 ; 57.785,24.257 v1@51.816,24.257 ; S5.1@60.198,93.98 58.42,93.98 56.642,92.202 49.657,92.202 48.946,92.888 ; v1(60.833,23.114) 60.833,24.13 ; v1(64.135,23.114) 64.135,24.13 ; v1(67.437,23.114) 67.437,24.13 ; v1(70.485,23.114) 70.485,24.13 ; 73.406,24.13 70.485,24.13 ; v1(73.533,23.114) 73.533,24.13 ; v1(84.709,34.29) v1@84.836,34.29 ; 85.344,30.226 85.344,31.496 ; 87.122,37.084 85.598,37.084 84.836,36.322 v1@84.836,34.29 ; 88.138,32.258 87.503,31.623 85.471,31.623 84.836,32.258 v1@84.836,34.29 ; 88.519,32.385 89.535,32.385 ; 90.043,23.749 v1(88.9,23.749) 83.693,23.749 82.804,24.638 82.804,27.432 v1(83.185,27.813) 85.852,30.48 88.011,30.48 89.662,32.131 89.662,32.385 91.186,32.385 91.694,31.877 v1@91.694,27.178 ; 90.17,23.749 91.694,25.273 v1@91.694,27.178 ; v1@90.678,80.899 v1(90.678,81.026) ; v1(91.567,27.178) v1@91.694,27.178 ; v1(96.774,44.958) 99.06,42.672 v1(99.06,41.91) ; v1(97.536,33.782) 97.536,35.052 ; v1(102.743,34.036) 102.743,34.417 ; v1(104.14,41.91) 104.013,41.91 106.426,44.323 v1(106.934,44.323) ; v1(104.267,44.679) 104.267,44.628 104.292,44.602 104.292,42.316 ; J10.5@109.22,8.89 109.22,10.033 110.109,10.922 123.571,10.922 123.825,11.176 v1(128.27,11.176) ; v1@120.777,87.122 v1(121.031,87.122) ; v1(122.936,29.464) 123.19,29.718 126.619,29.718 127.762,30.861 v1(128.905,30.861) 129.032,30.861 130.048,29.845 131.445,29.845 v1(131.445,29.718) 132.334,30.607 v1(137.795,30.607) 138.176,30.607 139.065,29.718 v1(142.113,29.718) 142.113,29.845 142.748,30.48 152.273,30.48 v1(153.035,31.242) 153.035,30.734 153.67,30.099 157.861,30.099 158.75,29.21 158.877,29.083 158.75,29.083 v1(158.623,29.21) ; v1(128.27,86.995) v1@128.27,87.122 ; v1(159.512,28.575) 159.512,29.21 ; v1@40.894,24.765 41.91,24.765 42.418,24.257 v1@51.816,24.257 ; 48.946,92.888 49.022,92.964 49.022,97.155 48.387,97.79 47.117,97.79 49.022,99.695 49.022,104.013 ; 57.785,24.13 60.833,24.13 ; 60.833,24.13 64.135,24.13 ; 64.135,24.13 67.437,24.13 ; 67.437,24.13 70.485,24.13 ; 97.536,35.052 97.536,35.306 v1(99.06,36.83) 100.203,36.83 v1(100.33,36.83) v1(101.6,36.83) 102.489,36.83 v1(102.87,36.83) 102.87,34.544 102.743,34.417 ; 97.536,35.052 97.663,35.179 102.108,35.179 102.743,34.544 102.743,34.417
  Bottom Layer, Bottom w1.016: J4.2@3.81,82.55 3.81,82.804 3.937,82.931 25.781,82.931 26.543,83.693 28.956,83.693 30.988,85.725 43.18,85.725 ; v1(20.701,70.866) 20.955,71.12 S4.1@26.67,71.12 28.702,71.12 30.607,69.215 35.687,69.215 37.719,71.247 43.18,71.247 S3.1@43.18,71.12 ; v1@24.003,40.386 v1(27.051,40.386) v1@27.051,40.513 ; v1(31.115,24.892) v1(40.894,24.892) ; J18.2@33.02,3.81 32.995,3.785 32.995,1.93 33.655,1.27 40.97,1.27 41.885,2.184 ; S2.1@43.18,83.312 S2.1@43.18,83.82 43.18,84.328 43.18,85.725 ; U11.2@46.99,110.49 46.736,110.49 46.736,112.141 47.879,113.284 62.738,113.284 63.5,112.522 63.5,110.871 J21.2@63.5,110.49 ; J20.1@57.125,3.785 57.15,2.21 57.125,2.184 56.21,1.27 42.545,1.27 41.885,1.93 41.885,2.184 ; J12.20@66.04,59.69 67.945,59.69 J12.18@68.453,59.69 ; J12.18@68.58,59.69 70.739,59.69 J12.16@71.12,59.69 73.152,59.69 J12.14@73.66,59.69 75.311,59.69 J12.12@76.2,59.69 77.978,59.69 J12.10@78.74,59.69 79.502,59.69 J12.8@81.28,59.69 83.439,59.69 J12.6@83.82,59.69 85.725,59.69 J12.4@86.36,59.69 86.36,58.674 87.249,57.785 90.805,57.785 92.71,59.69 v1(128.27,59.69) v1(138.43,59.69) 166.497,59.69 167.767,58.42 R33.3@167.64,58.42 ; J11.11@76.2,78.74 76.2,78.867 76.2,79.121 76.2,81.153 73.787,83.566 56.261,83.566 53.975,85.852 43.307,85.852 43.18,85.852 43.18,85.725 ; v1(76.454,86.868) 76.454,87.122 77.749,88.417 v1(88.265,88.392) ; J11.7@81.28,78.74 81.28,78.867 81.28,79.629 82.55,80.899 90.678,80.899 102.489,80.899 103.886,82.296 v1(128.397,82.296) ; v1@87.884,88.392 v1(88.265,88.392) ; 91.948,32.004 93.853,33.909 97.155,33.909 ; v1(102.87,36.83) v1(104.14,36.83) 106.045,36.83 106.934,35.941 121.92,35.941 122.428,36.449 v1(167.005,36.449) 167.259,36.449 v1(168.275,36.449) v1(169.545,36.449) ; v1@120.777,87.122 v1(108.585,87.122) 106.172,87.122 v1(104.902,88.392) v1(88.265,88.392) ; v1(121.031,87.122) 128.27,87.122 v1(147.32,87.122) ; LCD1.1@138.43,63.5 138.811,63.5 LCD1.16@140.97,63.5 ; v1(150.241,82.423) v1(166.497,82.423) ; 41.885,2.184 41.885,3.785 41.91,2.21 41.885,2.184
  Bottom Layer, Bottom w1.27: 97.282,38.608 97.536,38.354 104.775,38.354 ; 98.298,41.148 105.156,41.148 ; 98.552,40.259 104.902,40.259 ; 98.679,39.243 104.902,39.243 ; 98.806,37.592 104.521,37.592 ; v1@98.806,41.91 104.775,41.91 ; v1@99.187,38.1 v1(104.14,38.1) ; 99.187,42.291 103.886,42.291 ; R35.3@101.473,107.188 R35.3@101.6,107.188 101.727,107.188 102.362,107.188 104.673,104.877 104.673,98.323 ; 101.727,33.909 103.632,33.909 ; 107.061,36.957 108.204,36.957 ; LCD2.5@114.833,96.495 114.833,97.765 113.665,98.933 105.283,98.933 104.673,98.323 ; J23.9@125.73,110.49 125.984,110.49 J9.1@130.81,110.49 130.81,112.522 131.826,113.538 139.827,113.538 140.97,112.395 J9.5@140.97,110.49 ; 158.369,13.843 161.544,13.843 ; 163.449,21.463 167.386,21.463 ; 167.386,14.097 171.831,14.097 ; 104.673,98.323 LCD2.1@104.673,96.495 104.648,98.298 104.673,98.323
  Bottom Layer, Bottom w1.778: J1.1@3.81,13.97 6.655,13.97 9.195,11.43 18.085,11.43 19.202,10.312 ; J3.1@3.81,26.67 5.588,26.67 ; J7.1@3.81,49.53 6.731,49.53 6.731,64.77 ; J6.2@3.81,64.77 6.731,64.77 ; J5.1@3.81,72.39 6.731,72.39 ; J4.2@3.81,82.55 6.731,82.55 6.731,72.39 ; 5.715,26.797 6.731,27.813 6.731,49.403 ; U1.3@19.456,8.865 U1.3@19.456,9.119 ; J18.2@33.02,3.81 33.02,4.318 33.02,6.477 ; J19.4@41.885,3.785 41.91,6.604 ; J12.18@68.453,59.69 J12.18@68.58,59.69 ; J15.3@77.47,3.81 77.47,4.064 77.47,6.604 ; J22.4@88.9,3.81 88.9,6.604 77.47,6.604 ; J2.1@153.645,3.785 153.67,6.604 164.465,6.604 165.1,5.969 J16.2@165.1,3.785 165.125,3.785 J16.1@167.64,3.785 ; v1(158.623,29.21) 158.75,29.21 159.512,29.21 v1(166.751,29.21) v1(167.767,29.21) v1(168.91,29.21) v1@169.164,29.21 ; C37.2@159.69,13.97 159.766,13.97 159.766,12.446 160.782,11.43 167.132,11.43 168.275,12.573 168.275,13.97 C38.2@168.58,13.97 ; 6.731,64.77 6.731,72.39 ; 19.202,10.312 21.971,13.081 23.876,13.081 24.638,13.843 28.448,13.843 29.591,12.7 29.591,9.906 33.02,6.477 ; 19.202,10.312 19.177,10.287 19.177,10.033 U1.3@19.355,9.855 ; 19.202,10.312 19.355,10.16 U1.3@19.355,9.855 ; U1.3@19.355,9.855 19.456,9.754 U1.3@19.456,9.119 ; U1.3@19.355,9.855 19.355,9.22 U1.3@19.456,9.119 ; 33.02,6.477 33.02,6.604 41.91,6.604 ; 41.91,6.604 51.435,6.604 54.254,3.785 J20.1@57.125,3.785 57.125,2.184 57.125,2.057 57.658,1.524 70.866,1.524 72.136,2.794 72.136,5.588 73.152,6.604 77.47,6.604 ; J11.12@76.2,76.073 J11.12@76.2,76.2 J11.11@76.2,78.74 76.327,78.867 80.772,78.867 80.899,78.74 J11.7@81.28,78.74 81.026,78.486 81.026,76.073 J11.12@76.2,76.073
  other v1: 53.594,3.048 81.534,6.858 83.439,6.985 159.766,7.239 39.497,11.938 48.641,12.446 46.355,12.954 46.355,14.732 75.184,15.24 58.674,15.621 56.134,15.748 160.02,18.542 151.892,18.923 9.017,19.05 113.03,19.558 132.715,21.082 15.494,21.336 139.319,21.717 141.732,21.971 19.304,22.225 27.559,25.146 9.017,26.289 151.765,26.924 133.35,27.178 87.503,27.432 109.22,27.559 43.307,28.321 25.908,30.607 165.481,32.004 46.787,32.537 43.307,33.401 157.988,33.401 26.543,34.544 163.322,36.83 157.353,37.465 147.066,38.735 134.493,39.624 37.465,39.878 42.926,40.005 126.111,40.386 29.083,40.513 64.897,43.561 37.973,43.688 59.563,43.688 62.23,43.688 68.453,43.688 47.752,43.815 29.21,44.577 40.513,45.085 166.751,47.625 164.592,47.879 39.878,48.006 127.635,48.768 151.638,48.895 66.929,49.047 72.136,49.047 144.526,49.276 133.985,49.784 37.719,52.07 163.068,52.07 165.354,52.07 114.3,52.705 122.301,52.959 127.889,53.086 43.688,53.213 51.435,53.213 47.625,53.34 37.338,53.518 101.473,55.753 128.397,56.261 117.094,56.388 51.308,56.642 55.626,56.896 58.801,56.896 103.505,56.896 23.241,57.277 47.625,57.404 151.638,57.658 89.027,57.785 147.701,58.42 34.925,59.055 41.656,59.182 134.493,59.436 95.377,59.69 124.714,60.325 116.84,60.579 29.337,61.468 103.251,61.976 22.225,62.23 19.685,67.31 163.068,70.104 123.952,70.358 31.75,70.485 36.83,70.485 162.687,74.168 92.075,74.422 34.29,75.565 20.32,76.2 163.195,77.851 92.075,78.74 94.869,79.121 126.619,79.248 23.495,79.375 30.48,79.375 105.537,80.01 123.571,80.137 141.478,81.407 94.234,86.868 167.64,87.757 103.759,93.726 94.361,96.266 141.224,101.092 168.275,101.473 125.222,103.886 106.172,104.14
GNDH: J17.1 Q3.3 Q4.3 Q5.3 R66.1 R70.1 R74.1 | length 64.5
  Top Layer, Top w0.762: Q5.3@23.8,95.885 25.705,93.98 31.115,93.98 31.42,94.285 R74.1@33.655,94.285 ; Q4.3@24.435,101.6 25.705,100.33 R70.1@33.325,100.33 ; Q3.3@24.435,107.95 25.705,106.68 30.48,106.68 30.785,106.985 R66.1@33.655,106.985
  Bottom Layer, Bottom w1.016: J17.1@3.81,93.98 6.35,93.98 7.62,95.25 23.495,95.25 24.13,95.885 Q5.3@24.13,96.52 Q4.3@24.13,102.87 Q3.3@24.13,109.22
GP_0: R20.2 U4.45 | length 123.3
  Top Layer, Top w0.254: v1(21.971,54.737) R20.2@21.971,56.185 ; v1(32.766,26.162) 32.766,45.593 31.623,46.736 31.623,49.022 32.766,50.165 v1(32.766,54.737) ; v1(104.394,25.273) 105.105,26.111 U4.45@105.105,31.902
  Bottom Layer, Bottom w0.254: v1(21.971,54.737) v1(32.766,54.737) ; v1(32.766,26.162) 33.02,25.908 42.545,25.908 43.307,25.146 74.93,25.146 77.216,22.86 90.932,22.86 94.107,26.035 103.251,26.035 104.013,25.273 v1(104.394,25.273)
GP_1: R21.2 U4.21 | length 93.2
  Top Layer, Top w0.254: R21.2@21.971,53.01 22.098,52.705 v1(23.114,52.705) ; v1(36.576,37.211) 36.576,38.608 36.195,38.989 36.195,50.673 36.576,51.054 v1(36.576,52.324) ; v1(88.519,34.036) 88.646,33.909 89.916,33.909 91.389,35.382 U4.21@94.132,35.382
  Bottom Layer, Bottom w0.254: v1(23.114,52.705) 23.749,52.07 34.671,52.07 34.925,52.324 v1(36.576,52.324) ; v1(36.576,37.211) 36.83,37.211 37.211,36.83 41.529,36.83 41.91,36.449 51.435,36.449 52.451,37.465 ; 52.324,37.465 83.947,37.465 84.328,37.846 87.757,37.846 88.519,37.084 v1(88.519,34.036)
GP_2: R22.2 U4.20 | length 91.8
  Top Layer, Top w0.254: R22.2@21.971,49.835 21.971,50.038 v1(21.971,51.308) ; v1(35.56,38.1) v1(35.56,51.435) ; v1(89.408,34.925) 90.043,34.925 90.983,35.865 U4.20@94.132,35.865
  Bottom Layer, Bottom w0.254: v1(21.971,51.308) 22.098,51.435 v1(35.56,51.435) ; v1(35.56,38.1) 44.704,38.1 46.736,40.132 69.088,40.132 71.247,38.1 73.025,38.1 73.279,38.354 88.138,38.354 89.154,37.338 89.154,37.084 89.154,35.179 v1(89.408,34.925)
INC: R26.2 S2.2 U4.91 | length 102.2
  Top Layer, Top w0.254: v1(38.1,56.388) 38.1,76.2 41.021,79.121 43.434,79.121 S2.2@43.18,79.299 ; U4.91@100.101,46.863 v1(100.101,56.109)
  Top Layer, Top w0.508: R26.2@43.18,76.454 S2.2@43.18,79.883
  Bottom Layer, Bottom w0.254: v1(38.1,56.388) 39.116,55.372 95.631,55.372 96.52,56.261 99.187,56.261 99.339,56.109 v1(100.101,56.109)
INHIBIT: R60.1 U4.27 | length 75.9
  Top Layer, Top w0.254: v1(46.863,30.734) 46.863,30.607 46.482,30.226 46.482,25.273 46.863,24.892 46.863,25.019 R60.1@47.625,24.892 ; v1(81.153,30.734) 81.153,29.845 80.264,28.956 80.264,23.114 82.042,21.209 93.853,21.209 95.504,22.733 95.504,24.765 94.869,25.4 94.869,29.21 96.088,30.429 U4.27@96.088,31.902
  Bottom Layer, Bottom w0.254: v1(46.863,30.734) v1(81.153,30.734)
IO_0: J11.15 J11.16 U4.36 | length 95.7
  Top Layer, Top w0.254: J11.16@71.12,76.073 71.12,72.39 72.39,71.12 72.39,54.61 74.549,52.451 74.549,32.004 77.343,29.21 77.343,20.447 78.486,19.304 80.137,19.304 80.264,19.431 v1(80.645,19.431) ; v1(98.044,19.431) 98.044,19.939 100.33,22.225 100.33,29.845 100.584,30.099 U4.36@100.584,31.902
  Top Layer, Top w0.457: J11.16@71.12,76.2 71.12,78.613 J11.15@71.12,78.74
  Bottom Layer, Bottom w0.254: v1(80.645,19.431) 80.899,19.685 96.139,19.685 96.393,19.431 v1(98.044,19.431)
IO_1: J11.13 J11.14 U4.37 | length 94.2
  Top Layer, Top w0.254: J11.14@73.66,76.2 73.66,74.93 74.93,73.66 74.93,53.34 75.057,53.213 75.057,32.258 77.851,29.464 77.851,20.955 78.74,20.066 v1(79.502,20.066) ; v1(99.695,20.193) 101.092,21.59 U4.37@101.092,31.902
  Top Layer, Top w0.457: J11.14@73.66,76.2 J11.13@73.66,78.74
  Bottom Layer, Bottom w0.254: v1(79.502,20.066) 79.756,20.32 96.52,20.32 96.647,20.193 v1(99.695,20.193)
LCD2_D4: U4.67 U5.4 | length 89
  Top Layer, Top w0.254: U4.67@109.068,41.377 119.99,41.377 v1(120.269,41.656) ; v1(157.48,42.545) U5.4@157.48,82.677
  Bottom Layer, Bottom w0.254: v1(120.269,41.656) 120.523,41.91 156.845,41.91 v1(157.48,42.545)
LCD2_D5: U4.66 U5.5 | length 90.7
  Top Layer, Top w0.254: U4.66@109.068,40.869 121.006,40.869 v1(121.285,41.148) ; v1(158.75,42.164) U5.5@158.75,82.677
  Bottom Layer, Bottom w0.254: v1(121.285,41.148) 121.539,41.402 157.988,41.402 v1(158.75,42.164)
LCD2_D6: U4.65 U5.6 | length 94.2
  Top Layer, Top w0.254: U4.65@109.068,40.386 121.793,40.386 122.174,40.767 122.174,43.561 v1(121.539,44.196) ; v1(159.766,44.069) 159.766,44.323 160.02,44.577 U5.6@160.02,82.677
  Bottom Layer, Bottom w0.254: v1(121.539,44.196) 159.893,44.196 v1(159.766,44.069)
LCD2_D7: U4.64 U5.7 | length 97.2
  Top Layer, Top w0.254: U4.64@109.068,39.878 122.428,39.878 122.809,40.259 122.809,44.577 v1@122.555,44.831 ; U5.7@161.29,82.677 161.29,51.308 162.814,49.784 v1(162.814,44.958)
  Bottom Layer, Bottom w0.254: v1(122.555,44.958) v1(162.814,44.958)
LCD2_ENABLE: U4.69 U5.3 | length 87.1
  Top Layer, Top w0.254: U4.69@109.068,42.367 117.678,42.367 v1(118.745,43.434) ; v1(156.21,43.307) U5.3@156.21,82.677
  Bottom Layer, Bottom w0.254: v1(118.745,43.434) v1@156.21,43.434 ; v1@156.21,43.18 v1(156.21,43.307)
LCD2_RS: U4.68 U5.2 | length 86.8
  Top Layer, Top w0.254: U4.68@109.068,41.885 118.72,41.885 v1(119.126,42.291) 118.872,41.91 ; U5.2@154.94,82.677 v1(155.067,42.672)
  Bottom Layer, Bottom w0.254: v1(119.126,42.291) 119.38,42.291 119.634,42.545 154.813,42.545 154.94,42.672 v1(155.067,42.672)
LCD_D4: R34.2 U4.78 | length 13.3
  Top Layer, Top w0.254: U4.78@106.604,46.863 106.604,48.565 113.157,55.118 R34.2@113.157,57.404